# Altium PCB Cum LED v2 Ghep.PcbDoc
Units mm, origin at the board's own origin, x right, y up, seen from the top; angles counter-clockwise.
Board outline 94.11 x 94.11 mm, 2 copper layers (Top Layer, Bottom Layer); 36 components, 0 nets, 84 pads, 24 vias.
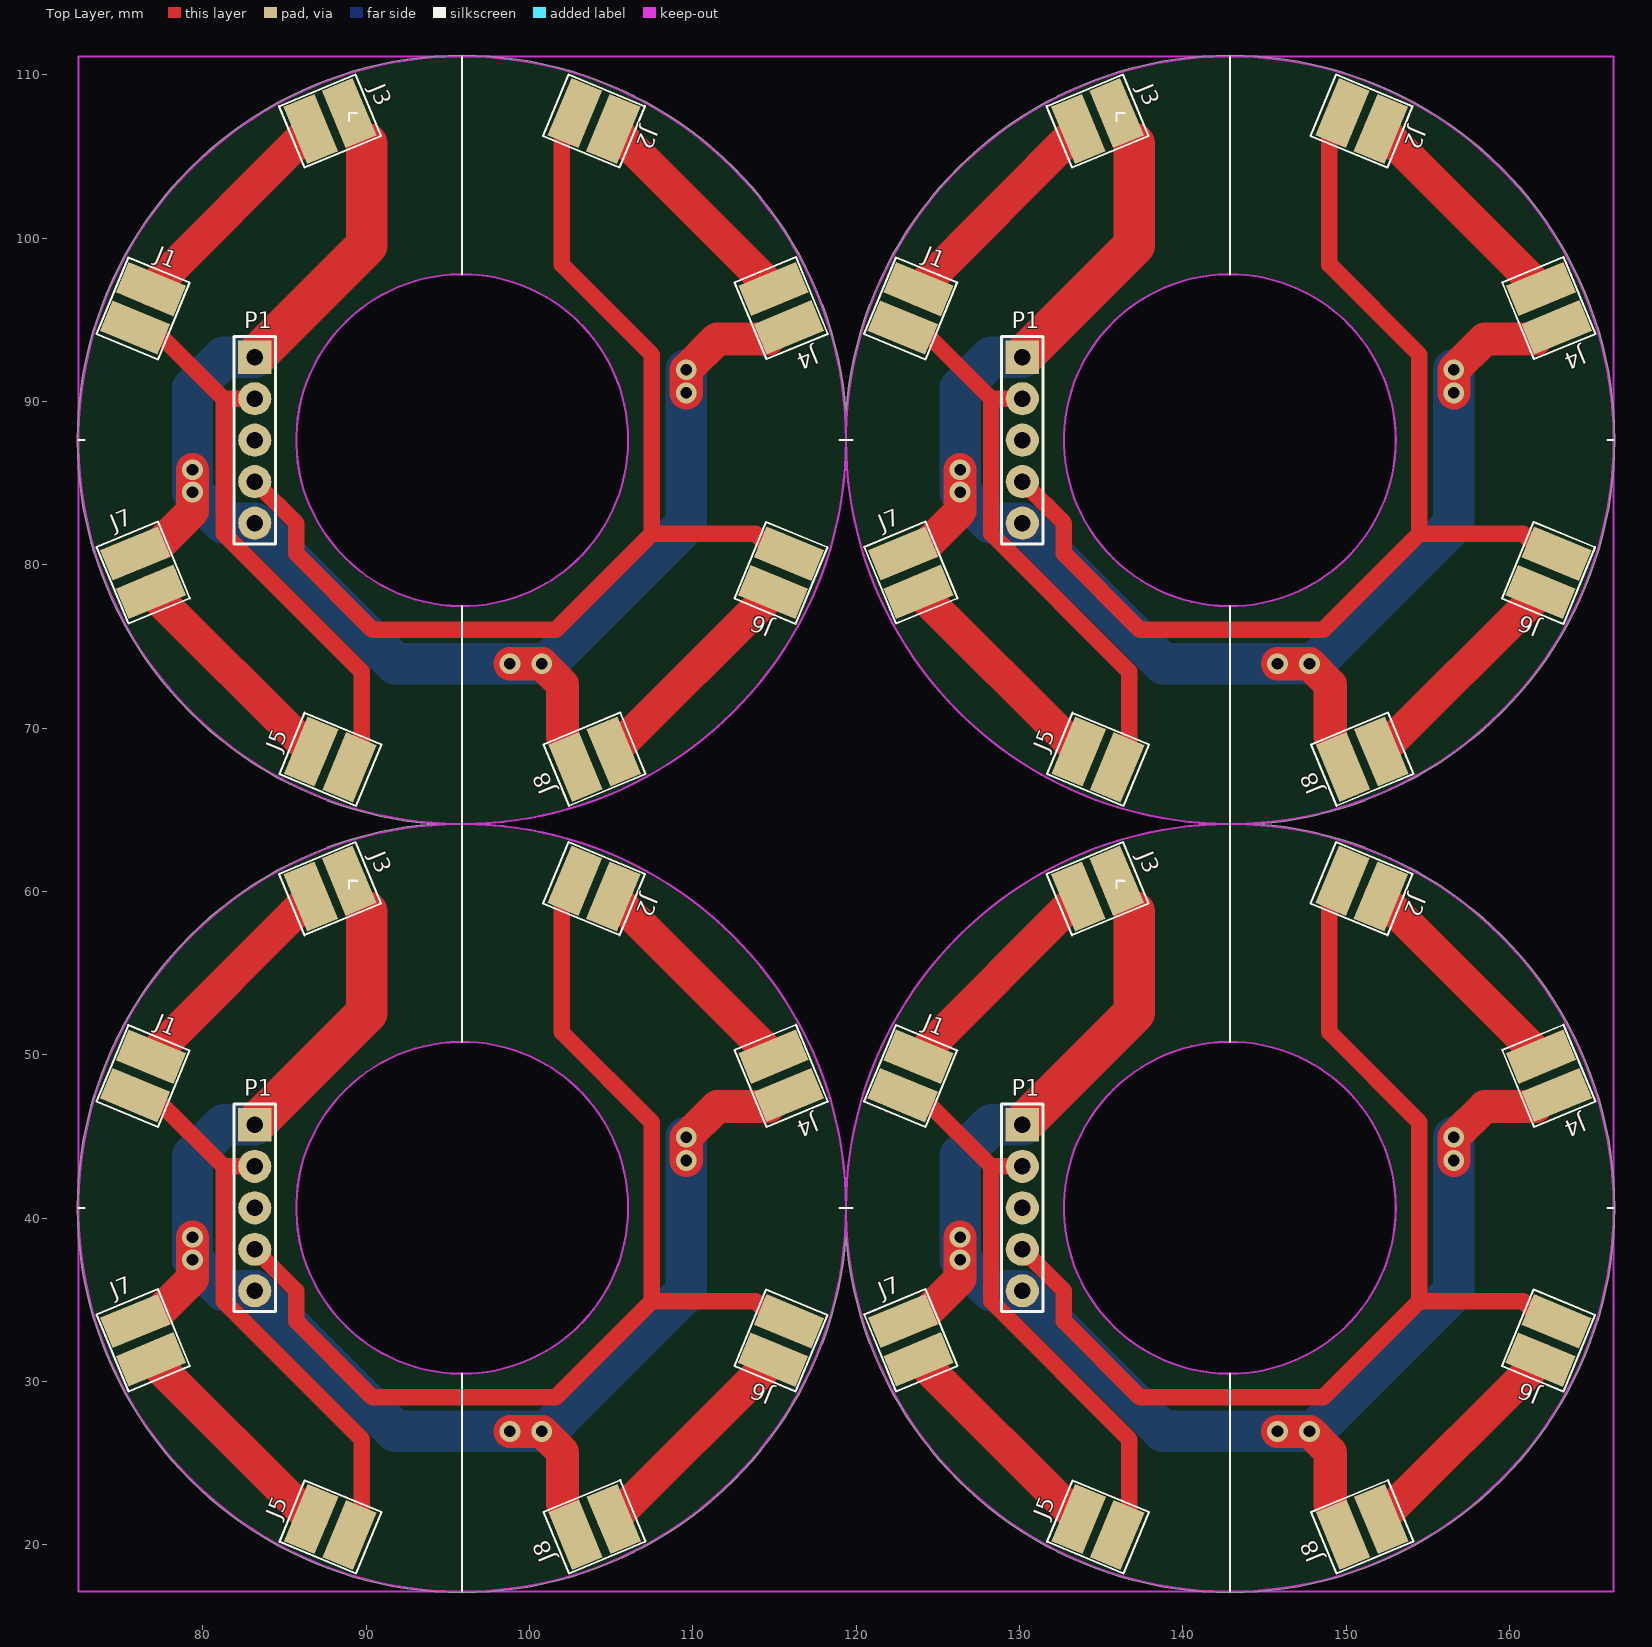
[diagram p0: Top Layer view]
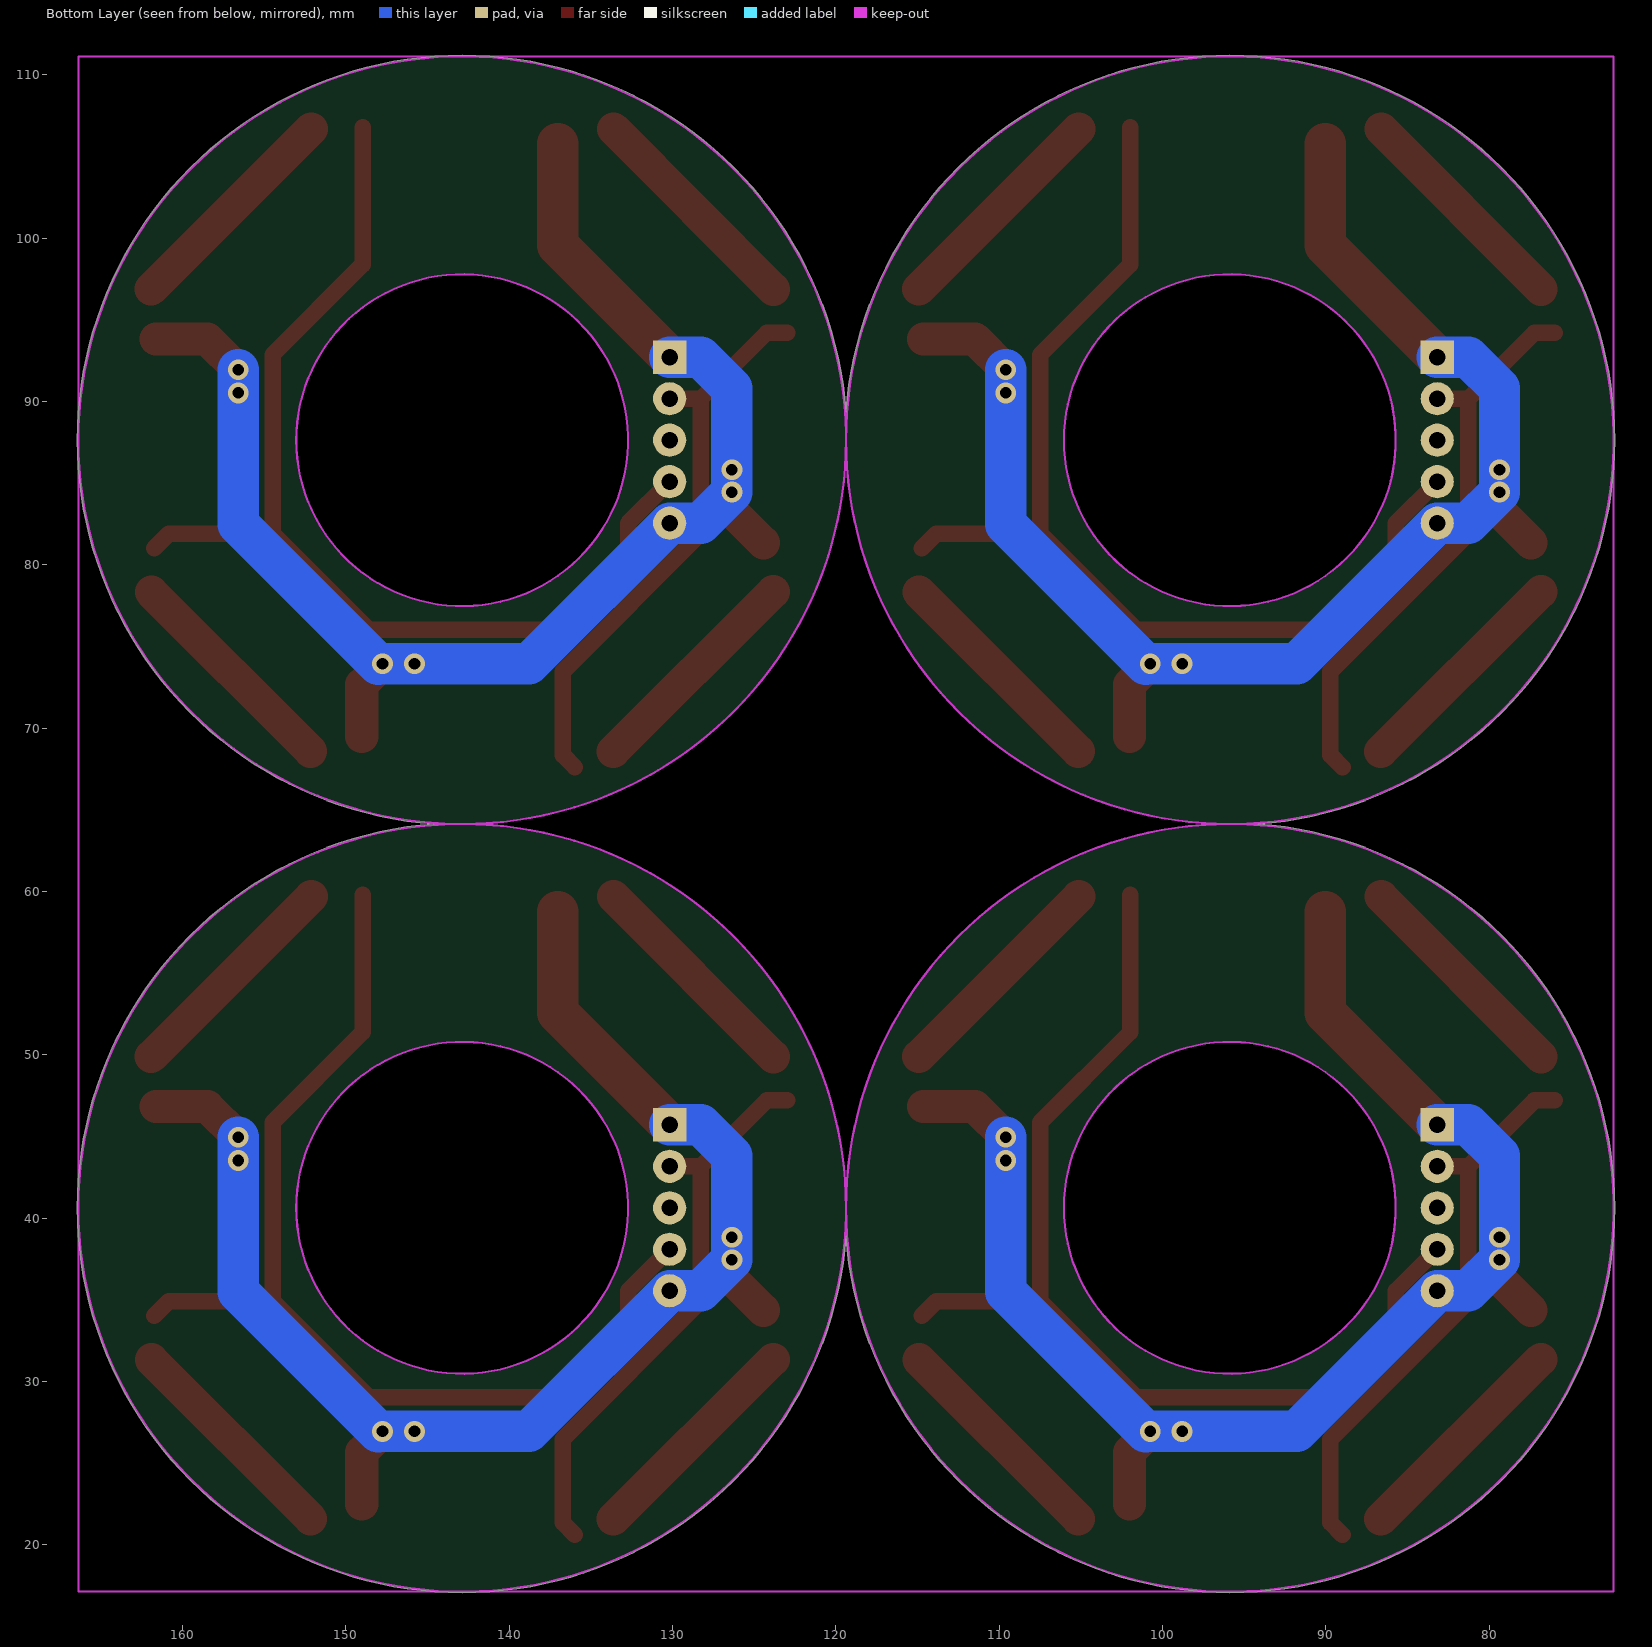
[diagram p1: Bottom Layer view, seen from below]

## Layer stack, top to bottom
Top Solder: solder mask 0.0102, Solder Resist, Dk 3.5
Top Layer: signal copper 0.0356
Dielectric 1: dielectric 0.32, FR-4, Dk 4.8
Bottom Layer: signal copper 0.0356
Bottom Solder: solder mask 0.0102, Solder Resist, Dk 3.5

## Board outline
72.326,40.64 cw(c95.885,40.64) 94.151,64.135 cw(c95.885,87.63) 72.326,87.63 cw(c95.885,87.63) 95.885,111.189 cw(c95.885,87.63) 119.38,89.364 cw(c142.875,87.63) 142.875,111.189 cw(c142.875,87.63) 166.434,87.63 cw(c142.875,87.63) 144.609,64.135 cw(c142.875,40.64) 166.434,40.64 cw(c142.875,40.64) 142.875,17.081 cw(c142.875,40.64) 119.38,38.906 cw(c95.885,40.64) 95.885,17.081 cw(c95.885,40.64)
cut-out: 95.885,64.135 cw(c95.885,40.64) 119.38,40.64 cw(c142.875,40.64) 142.875,64.135 cw(c142.875,87.63) 119.38,87.63 cw(c95.885,87.63)
cut-out: 85.725,87.63 ccw(c95.885,87.63) 95.885,77.47 ccw(c95.885,87.63) 106.045,87.63 ccw(c95.885,87.63) 95.885,97.79 ccw(c95.885,87.63)
cut-out: 132.715,87.63 ccw(c142.875,87.63) 142.875,77.47 ccw(c142.875,87.63) 153.035,87.63 ccw(c142.875,87.63) 142.875,97.79 ccw(c142.875,87.63)
cut-out: 85.725,40.64 ccw(c95.885,40.64) 95.885,30.48 ccw(c95.885,40.64) 106.045,40.64 ccw(c95.885,40.64) 95.885,50.8 ccw(c95.885,40.64)
cut-out: 132.715,40.64 ccw(c142.875,40.64) 142.875,30.48 ccw(c142.875,40.64) 153.035,40.64 ccw(c142.875,40.64) 142.875,50.8 ccw(c142.875,40.64)

## Design rules (kind name [scope] priority, off if disabled: settings)
Clearance [All] p1: gap=0.254 ignorepadtopadclearanceinfootprint=FALSE except(0: Arc-Hole Track-Hole SMDPad-Hole THPad-Hole Via-Hole Fill-Hole Poly-Hole Region-Hole Text-Hole)
PolygonConnect [All] p1: connectstyle=Relief reliefconductorwidth=0.254 reliefentries=4 polygonreliefangle="90 Angle" airgapwidth=0.254
RoutingVias [All] p1: holewidth=0.711 width=1.27 viastyle="Through Hole" minholewidth=0.711 minwidth=1.27 maxholewidth=0.711 maxwidth=1.27
SolderMaskExpansion [All] p1: expansion=0.102
Width [All] p1: maxlimit=0.254 minlimit=0.254 preferedwidth=0.254
30 further rules are at their usual default settings.

## Components (designator, comment, footprint, x,y, rotation, side; value= is the part's Value field where it differs from the comment)
J1 "Giắc xanh loại nằm, 300V/16A - 5.08mm LED 1" "LED OSRAM CIRCUIT" 76.835,96.876 r247.5 top value="LED 1"
J1 "Giắc xanh loại nằm, 300V/16A - 5.08mm LED 1" "LED OSRAM CIRCUIT" 123.825,96.876 r247.5 top value="LED 1"
J1 "Giắc xanh loại nằm, 300V/16A - 5.08mm LED 1" "LED OSRAM CIRCUIT" 76.835,49.886 r247.5 top value="LED 1"
J1 "Giắc xanh loại nằm, 300V/16A - 5.08mm LED 1" "LED OSRAM CIRCUIT" 123.825,49.886 r247.5 top value="LED 1"
J2 "Giắc xanh loại nằm, 300V/16A - 5.08mm LED 5" "LED OSRAM CIRCUIT" 105.131,106.68 r157.5 top value="LED 5"
J2 "Giắc xanh loại nằm, 300V/16A - 5.08mm LED 5" "LED OSRAM CIRCUIT" 152.121,106.68 r157.5 top value="LED 5"
J2 "Giắc xanh loại nằm, 300V/16A - 5.08mm LED 5" "LED OSRAM CIRCUIT" 105.131,59.69 r157.5 top value="LED 5"
J2 "Giắc xanh loại nằm, 300V/16A - 5.08mm LED 5" "LED OSRAM CIRCUIT" 152.121,59.69 r157.5 top value="LED 5"
J3 "Giắc xanh loại nằm, 300V/16A - 5.08mm LED 2" "LED OSRAM CIRCUIT" 88.961,107.652 r202.5 top value="LED 2"
J3 "Giắc xanh loại nằm, 300V/16A - 5.08mm LED 2" "LED OSRAM CIRCUIT" 135.951,107.652 r202.5 top value="LED 2"
J3 "Giắc xanh loại nằm, 300V/16A - 5.08mm LED 2" "LED OSRAM CIRCUIT" 88.961,60.662 r202.5 top value="LED 2"
J3 "Giắc xanh loại nằm, 300V/16A - 5.08mm LED 2" "LED OSRAM CIRCUIT" 135.951,60.662 r202.5 top value="LED 2"
J4 "Giắc xanh loại nằm, 300V/16A - 5.08mm LED 6" "LED OSRAM CIRCUIT" 115.9,94.539 r112.5 top value="LED 6"
J4 "Giắc xanh loại nằm, 300V/16A - 5.08mm LED 6" "LED OSRAM CIRCUIT" 162.89,94.539 r112.5 top value="LED 6"
J4 "Giắc xanh loại nằm, 300V/16A - 5.08mm LED 6" "LED OSRAM CIRCUIT" 115.9,47.549 r112.5 top value="LED 6"
J4 "Giắc xanh loại nằm, 300V/16A - 5.08mm LED 6" "LED OSRAM CIRCUIT" 162.89,47.549 r112.5 top value="LED 6"
J5 "Giắc xanh loại nằm, 300V/16A - 5.08mm LED 3" "LED OSRAM CIRCUIT" 86.639,68.58 r337.5 top value="LED 3"
J5 "Giắc xanh loại nằm, 300V/16A - 5.08mm LED 3" "LED OSRAM CIRCUIT" 133.629,68.58 r337.5 top value="LED 3"
J5 "Giắc xanh loại nằm, 300V/16A - 5.08mm LED 3" "LED OSRAM CIRCUIT" 86.639,21.59 r337.5 top value="LED 3"
J5 "Giắc xanh loại nằm, 300V/16A - 5.08mm LED 3" "LED OSRAM CIRCUIT" 133.629,21.59 r337.5 top value="LED 3"
J6 "Giắc xanh loại nằm, 300V/16A - 5.08mm LED 7" "LED OSRAM CIRCUIT" 114.91,78.334 r67.5 top value="LED 7"
J6 "Giắc xanh loại nằm, 300V/16A - 5.08mm LED 7" "LED OSRAM CIRCUIT" 161.9,78.334 r67.5 top value="LED 7"
J6 "Giắc xanh loại nằm, 300V/16A - 5.08mm LED 7" "LED OSRAM CIRCUIT" 114.91,31.344 r67.5 top value="LED 7"
J6 "Giắc xanh loại nằm, 300V/16A - 5.08mm LED 7" "LED OSRAM CIRCUIT" 161.9,31.344 r67.5 top value="LED 7"
J7 "Giắc xanh loại nằm, 300V/16A - 5.08mm LED 4" "LED OSRAM CIRCUIT" 75.87,80.696 r292.5 top value="LED 4"
J7 "Giắc xanh loại nằm, 300V/16A - 5.08mm LED 4" "LED OSRAM CIRCUIT" 122.86,80.696 r292.5 top value="LED 4"
J7 "Giắc xanh loại nằm, 300V/16A - 5.08mm LED 4" "LED OSRAM CIRCUIT" 75.87,33.706 r292.5 top value="LED 4"
J7 "Giắc xanh loại nằm, 300V/16A - 5.08mm LED 4" "LED OSRAM CIRCUIT" 122.86,33.706 r292.5 top value="LED 4"
J8 "Giắc xanh loại nằm, 300V/16A - 5.08mm LED 8" "LED OSRAM CIRCUIT" 102.819,67.615 r22.5 top value="LED 8"
J8 "Giắc xanh loại nằm, 300V/16A - 5.08mm LED 8" "LED OSRAM CIRCUIT" 149.809,67.615 r22.5 top value="LED 8"
J8 "Giắc xanh loại nằm, 300V/16A - 5.08mm LED 8" "LED OSRAM CIRCUIT" 102.819,20.625 r22.5 top value="LED 8"
J8 "Giắc xanh loại nằm, 300V/16A - 5.08mm LED 8" "LED OSRAM CIRCUIT" 149.809,20.625 r22.5 top value="LED 8"
P1 "Header 5" HDR1X5 83.185,92.71 r270 top
P1 "Header 5" HDR1X5 130.175,92.71 r270 top
P1 "Header 5" HDR1X5 83.185,45.72 r270 top
P1 "Header 5" HDR1X5 130.175,45.72 r270 top

## Footprints (in the part's own frame and the unit in brackets; to place one, negate y for a bottom-side part, rotate by r counter-clockwise, add the part's x,y. Pads: shape width x height; smd on the part's side, far side on the other; paste and mask are expansions set on the pad)
HDR1X5 [mil] "Connector; Header; 5 Position"
  rect 80x80 hole 40: 1(0,0)
  round 80 hole 40: 2(100,0) 3(200,0) 4(300,0) 5(400,0)
  silkscreen extent -50,-50 450,50
"LED OSRAM CIRCUIT" [mil]
  rect 80x150 smd: 1(0,0) 2(100,0)
  silkscreen extent -50,-80 150,80, body extent -137,-194 237,-10, height 26

## Part data
J1 J1 J1 J1 J2 J2 J2 J2 J3 J3 J3 J3 J4 J4 J4 J4 J5 J5 J5 J5 J6 J6 J6 J6 J7 J7 J7 J7 J8 J8 J8 J8: library part CON2, Type1="Gi?c xanh lo?i n?m, 300V/16A - 5.08mm", Type2="Jump d?c lo?i th?ng, 2.54mm", Type3=Jumper, Type4="Gi?c xanh lo?i n?m, 300V/16A - 3.81mm"
P1 P1 P1 P1: "Header, 5-Pin", LatestRevisionDate=17-Jul-2002, LatestRevisionNote="Re-released for DXP Platform.", Publisher="Altium Limited"

## Via types
v1: diameter 1.27, hole 0.711, Top Layer to Bottom Layer, 24 vias

## Nets (pads, with @x,y where several pads share a name; then routed paths per layer and width w, separated by ;. In a path a pad name is that pad's centre, name@x,y a point inside that pad or via, vN(x,y) a via of type N, cw(c..) or ccw(c..) an arc to the next point about the centre after c; other vN are vias at no path point)
pads on no net: J1.1 J1.2 J2.1 J2.2 J3.1 J3.2 J4.1 J4.2 J5.1 J5.2 J6.1 J6.2 J7.1 J7.2 J8.1 J8.2 P1.1 P1.2 P1.3 P1.4 P1.5
copper on no net: | length 1001.5
  Top Layer w1.016: 75.997,47.219 77.241,47.219 81.28,43.18 ; 75.997,94.209 77.241,94.209 81.28,90.17 ; 83.185,38.1 85.725,35.56 85.725,33.706 90.399,29.032 101.6,29.032 107.493,34.925 ; 83.185,43.18 81.28,43.18 ; 83.185,85.09 85.725,82.55 85.725,80.696 90.399,76.022 101.6,76.022 107.493,81.915 ; 83.185,90.17 81.28,90.17 ; 88.986,20.618 89.725,21.357 89.725,26.479 81.28,34.925 81.28,43.18 ; 88.986,67.608 89.725,68.347 89.725,73.469 81.28,81.915 81.28,90.17 ; 101.981,59.792 101.981,51.384 107.493,45.872 107.493,34.925 ; 101.981,106.782 101.981,98.374 107.493,92.862 107.493,81.915 ; 114.732,34.036 113.843,34.925 107.493,34.925 ; 114.732,81.026 113.843,81.915 107.493,81.915 ; 122.987,47.219 124.231,47.219 128.27,43.18 ; 122.987,94.209 124.231,94.209 128.27,90.17 ; 130.175,38.1 132.715,35.56 132.715,33.706 137.389,29.032 148.59,29.032 154.483,34.925 ; 130.175,43.18 128.27,43.18 ; 130.175,85.09 132.715,82.55 132.715,80.696 137.389,76.022 148.59,76.022 154.483,81.915 ; 130.175,90.17 128.27,90.17 ; 135.976,20.618 136.715,21.357 136.715,26.479 128.27,34.925 128.27,43.18 ; 135.976,67.608 136.715,68.347 136.715,73.469 128.27,81.915 128.27,90.17 ; 148.971,59.792 148.971,51.384 154.483,45.872 154.483,34.925 ; 148.971,106.782 148.971,98.374 154.483,92.862 154.483,81.915 ; 161.722,34.036 160.833,34.925 154.483,34.925 ; 161.722,81.026 160.833,81.915 154.483,81.915
  Top Layer w2.032: 76.835,49.886 86.614,59.69 ; 76.835,96.876 86.614,106.68 ; 76.842,31.359 86.639,21.59 ; 76.842,78.349 86.639,68.58 ; 77.445,34.366 79.375,36.297 v1(79.375,38.837) ; 77.445,81.356 79.375,83.287 v1(79.375,85.827) ; v1(98.806,26.949) v1(100.762,26.949) 102.032,25.679 102.032,22.504 ; v1(98.806,73.939) v1(100.762,73.939) 102.032,72.669 102.032,69.494 ; 105.131,59.69 114.928,49.895 ; 105.131,106.68 114.928,96.885 ; 105.166,21.597 114.91,31.344 ; 105.166,68.587 114.91,78.334 ; v1(109.601,43.536) v1(109.601,44.958) 111.481,46.838 114.63,46.838 ; v1(109.601,90.526) v1(109.601,91.948) 111.481,93.828 114.63,93.828 ; 123.825,49.886 133.604,59.69 ; 123.825,96.876 133.604,106.68 ; 123.832,31.359 133.629,21.59 ; 123.832,78.349 133.629,68.58 ; 124.435,34.366 126.365,36.297 v1(126.365,38.837) ; 124.435,81.356 126.365,83.287 v1(126.365,85.827) ; v1(145.796,26.949) v1(147.752,26.949) 149.022,25.679 149.022,22.504 ; v1(145.796,73.939) v1(147.752,73.939) 149.022,72.669 149.022,69.494 ; 152.121,59.69 161.918,49.895 ; 152.121,106.68 161.918,96.885 ; 152.156,21.597 161.9,31.344 ; 152.156,68.587 161.9,78.334 ; v1(156.591,43.536) v1(156.591,44.958) 158.471,46.838 161.62,46.838 ; v1(156.591,90.526) v1(156.591,91.948) 158.471,93.828 161.62,93.828
  Top Layer w2.54: 83.452,45.987 90.043,52.578 90.043,58.776 ; 83.452,92.977 90.043,99.568 90.043,105.766 ; 130.442,45.987 137.033,52.578 137.033,58.776 ; 130.442,92.977 137.033,99.568 137.033,105.766
  Bottom Layer w2.54: 83.185,45.72 81.28,45.72 79.375,43.815 v1(79.375,37.465) 81.28,35.56 83.185,35.56 91.796,26.949 v1(98.806,26.949) v1(100.762,26.949) 101.016,26.949 101.028,26.937 109.601,35.509 v1(109.601,44.958) ; 83.185,92.71 81.28,92.71 79.375,90.805 v1(79.375,84.455) 81.28,82.55 83.185,82.55 91.796,73.939 v1(98.806,73.939) v1(100.762,73.939) 101.016,73.939 101.028,73.927 109.601,82.499 v1(109.601,91.948) ; 130.175,45.72 128.27,45.72 126.365,43.815 v1(126.365,37.465) 128.27,35.56 130.175,35.56 138.786,26.949 v1(145.796,26.949) v1(147.752,26.949) 148.006,26.949 148.018,26.937 156.591,35.509 v1(156.591,44.958) ; 130.175,92.71 128.27,92.71 126.365,90.805 v1(126.365,84.455) 128.27,82.55 130.175,82.55 138.786,73.939 v1(145.796,73.939) v1(147.752,73.939) 148.006,73.939 148.018,73.927 156.591,82.499 v1(156.591,91.948)

## Keep-outs
Keep-Out Layer:
  circle w0.127: c95.885,87.63 r23.495
  circle w0.127: c95.885,87.63 r10.16
  circle w0.127: c142.875,87.63 r23.495
  circle w0.127: c142.875,87.63 r10.16
  circle w0.127: c95.885,40.64 r23.495
  circle w0.127: c95.885,40.64 r10.16
  circle w0.127: c142.875,40.64 r23.495
  circle w0.127: c142.875,40.64 r10.16
  lines w0.127: 72.39,17.145 166.37,17.145 166.37,111.125 72.39,111.125 72.39,17.145 ; 95.885,64.135 cw(c95.885,40.64) 119.38,40.64 cw(c142.875,40.64) 142.875,64.135 cw(c142.875,87.63) 119.38,87.63 cw(c95.885,87.63) 95.885,64.135

## Silkscreen, mask and mechanical layers (free items; w line width, h text height)
Top Overlay:
  lines w0.127: 72.39,40.64 72.771,40.64 ; 72.39,87.63 72.771,87.63 ; 88.961,60.179 88.961,60.662 89.443,60.662 ; 88.961,107.169 88.961,107.652 89.443,107.652 ; 95.885,17.145 95.885,30.48 ; 95.885,50.8 95.885,64.135 95.885,77.47 ; 95.885,97.79 95.885,111.125 ; 118.999,40.64 119.38,40.64 119.761,40.64 ; 118.999,87.63 119.38,87.63 119.761,87.63 ; 135.951,60.179 135.951,60.662 136.433,60.662 ; 135.951,107.169 135.951,107.652 136.433,107.652 ; 142.875,17.145 142.875,30.48 ; 142.875,50.8 142.875,64.135 142.875,77.47 ; 142.875,97.79 142.875,111.125 ; 165.989,40.64 166.37,40.64 ; 165.989,87.63 166.37,87.63